# EAGLE board RESISTORS_B (EAGLE 4.09)

Size 157.46 x 100 mm. Coordinates in mm from the lower left corner, seen from the top.
Outline: 0,0 157.46,0 157.46,100 0,100 0,0
Copper layers used: 

## Footprints (pad centres in the part's own frame; a part is rotated, then mirrored left to right if it is on the bottom)
MELF_1_059MM = smd 0.914 x 1.778: P$1 -3,0; P$2 3,0
MELF_2_085MM = smd 1.27 x 2.54: P$1 -4.3,0; P$2 4.3,0
MELF_3X_146MM = smd 1.676 x 1.6: P$1 -7.3,0; P$2 7.3,0
MELF_3_105MM = smd 1.422 x 1.4: P$1 -5.3,0; P$2 5.3,0
MELF_05_059MM = smd 0.635 x 1.27: P$1 -3,0; P$2 3,0
MELF_010_020MM = smd 0.203 x 0.406: P$1 -1,0; P$2 1,0
MELF_025_070MM = smd 1.27 x 2.54: P$1 -3.5,0; P$2 3.5,0
MELF_0125_034MM = smd 0.508 x 1.016: P$1 -1.7,0; P$2 1.7,0
WATT0125_050MM_H = drill 0.889 round: P$1 -2.54,0; P$2 2.54,0
WATT025_101MM_H = drill 0.889 round: P$1 -5.08,0; P$2 5.08,0
WATT05_101MM_H = drill 0.889 round: P$1 -5.08,0; P$2 5.08,0
WATT1_152MM_H = drill 0.889 round: P$1 -7.62,0; P$2 7.62,0
WATT2_203MM_H = drill 0.889 round: P$1 -10.16,0; P$2 10.16,0
WATT3_203MM_H = drill 0.889 round: P$1 -10.16,0; P$2 10.16,0
WATT0125_025MM_V = drill 0.889 round: P$1 -1.27,0; P$2 1.27,0
WATT025_025MM_V = drill 0.889 round: P$1 -1.027,0; P$2 1.027,0
WATT05_025MM_V = drill 0.889 round: P$1 -1.27,0; P$2 1.27,0
WATT1_050MM_V = drill 0.889 round: P$1 -2.54,0; P$2 2.54,0
WATT2_050MM_V = drill 0.889 round: P$1 -2.54,0; P$2 2.54,0
WATT3_050MM_V = drill 0.889 round: P$1 -2.54,0; P$2 2.54,0
WATT5_304MM_H = drill 0.889 round: P$1 -15.24,0; P$2 15.24,0
WATT0125_050MM_V = drill 0.889 round: P$1 -2.54,0; P$2 2.54,0
WATT025_050MM_V = drill 0.889 round: P$1 -2.54,0; P$2 2.54,0
WATT05_050MM_V = drill 0.889 round: P$1 -2.54,0; P$2 2.54,0
WATT5_050MM_V = drill 0.889 round: P$1 -2.54,0; P$2 2.54,0
PV2_050MM = drill 0.889 round: P$1 -2.54,0; P$2 2.54,0
PV2B_050MM = drill 0.889 round: P$1 -2.54,0; P$2 2.54,0
PV3_050MM = drill 0.889 round: P$1 -2.54,0; P$2 2.54,0
PV4_050MM = drill 0.889 round: P$1 -2.54,0; P$2 2.54,0
PV5_050MM = drill 0.889 round: P$1 -2.54,0; P$2 2.54,0
PV7_050MM = drill 0.889 round: P$1 -2.54,0; P$2 2.54,0
PV10_050MM = drill 0.889 round: P$1 -2.54,0; P$2 2.54,0
PV10S_076MM = drill 0.889 round: P$1 -3.81,0; P$2 3.81,0
RH5_304MM = drill 0.889 round: P$1 -15.24,0; P$2 15.24,0
RH10_355MM = drill 0.889 round: P$1 -17.78,0; P$2 17.78,0
RH25_508MM = drill 0.889 round: P$1 -25.4,0; P$2 25.4,0
RH50_711MM = drill 0.889 round: P$1 -35.56,0; P$2 35.56,0

## Placement (x,y rotation side)
E$1  MELF_1_059MM  [MELF_1_059MM]  45.08,13.17 90 top
E$2  MELF_2_085MM  [MELF_2_085MM]  26.03,13.17 90 top
E$3  MELF_3x_146MM  [MELF_3X_146MM]  8.25,13.17 90 top
E$4  MELF_3_105MM  [MELF_3_105MM]  15.87,13.17 90 top
E$5  MELF_05_059MM  [MELF_05_059MM]  52.7,13.17 90 top
E$6  MELF_010_020MM  [MELF_010_020MM]  67.94,13.17 90 top
E$7  MELF_025_070MM  [MELF_025_070MM]  36.19,13.17 90 top
E$8  MELF_0125_034MM  [MELF_0125_034MM]  60.32,13.17 90 top
E$9  WATT0125_050MM_H  [WATT0125_050MM_H]  8.25,61.43 0 top
E$10  wATT025_101MM_H  [WATT025_101MM_H]  26.03,61.43 0 top
E$11  WATT05_101MM_H  [WATT05_101MM_H]  41.27,61.43 0 top
E$12  WATT1_152MM_H  [WATT1_152MM_H]  59.05,61.43 0 top
E$13  WATT2_203MM_H  [WATT2_203MM_H]  81.91,61.43 0 top
E$14  WATT3_203MM_H  [WATT3_203MM_H]  107.31,61.43 0 top
E$15  WATT0125_025MM_V  [WATT0125_025MM_V]  8.25,48.73 0 top
E$16  WATT025_025MM_V  [WATT025_025MM_V]  26.03,48.73 0 top
E$17  WATT05_025MM_V  [WATT05_025MM_V]  41.27,48.73 0 top
E$18  WATT1_050MM_V  [WATT1_050MM_V]  59.05,71.59 0 top
E$19  WATT2_050MM_V  [WATT2_050MM_V]  81.91,71.59 0 top
E$20  WATT3_050MM_V  [WATT3_050MM_V]  107.31,71.59 0 top
E$21  WATT5_304MM_H  [WATT5_304MM_H]  137.79,61.43 0 top
E$22  WATT0125_050MM_V  [WATT0125_050MM_V]  8.25,71.59 0 top
E$23  WATT025_050MM_V  [WATT025_050MM_V]  26.03,71.59 0 top
E$24  WATT05_050MM_V  [WATT05_050MM_V]  41.27,71.59 0 top
E$25  WATT5_050MM_V  [WATT5_050MM_V]  135.25,71.59 0 top
E$26  PV2_050MM  [PV2_050MM]  10.79,91.91 0 top
E$27  PV2B_050MM  [PV2B_050MM]  28.57,91.91 0 top
E$28  PV3_050MM  [PV3_050MM]  46.35,91.91 0 top
E$29  PV4_050MM  [PV4_050MM]  64.13,91.91 0 top
E$30  PV5_050MM  [PV5_050MM]  81.91,91.91 0 top
E$31  PV7_050MM  [PV7_050MM]  99.69,91.91 0 top
E$32  PV10_050MM  [PV10_050MM]  117.47,91.91 0 top
E$33  PV10S_076MM  [PV10S_076MM]  146.68,91.91 0 top
E$34  RH5_304MM  [RH5_304MM]  41.27,30.95 0 top
E$35  RH10_355MM  [RH10_355MM]  71.75,43.65 0 top
E$36  RH25_508MM  [RH25_508MM]  127.63,43.65 0 top
E$37  RH50_711MM  [RH50_711MM]  117.47,15.71 0 top

## Library data of the parts
E$1-E$37 = POVRAY